# Altium PCB PCB2.PcbDoc
Units mm, origin at the board's own origin, x right, y up, seen from the top; angles counter-clockwise.
Board outline 79.5 x 87 mm, 4 copper layers (Top Layer, Int1 (GND), Int2 (GND), Bottom Layer), stack 1.369 mm thick; 72 components, 101 nets, 318 pads, 105 vias.
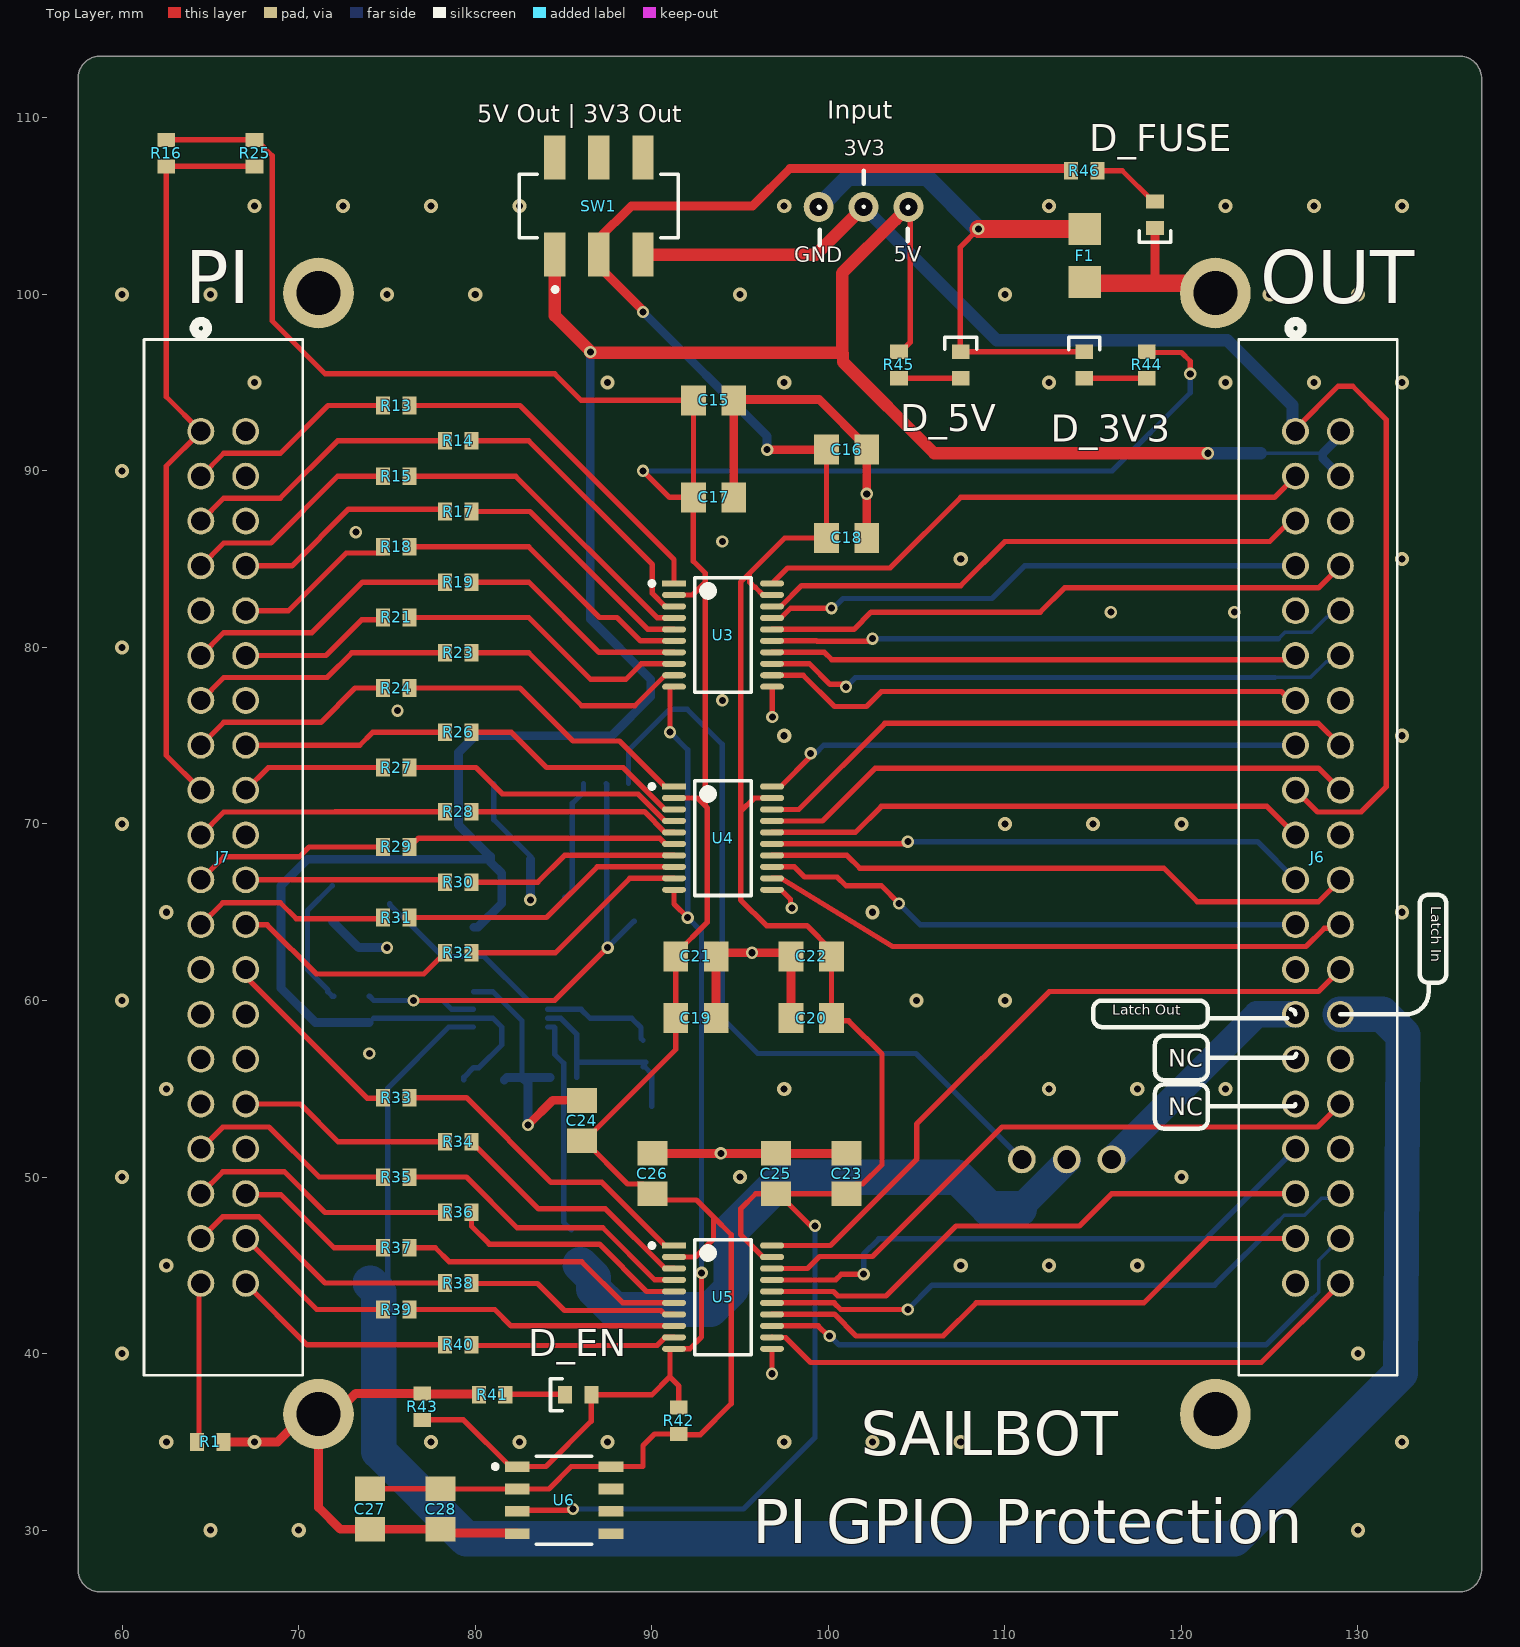
[diagram p0: Top Layer view]
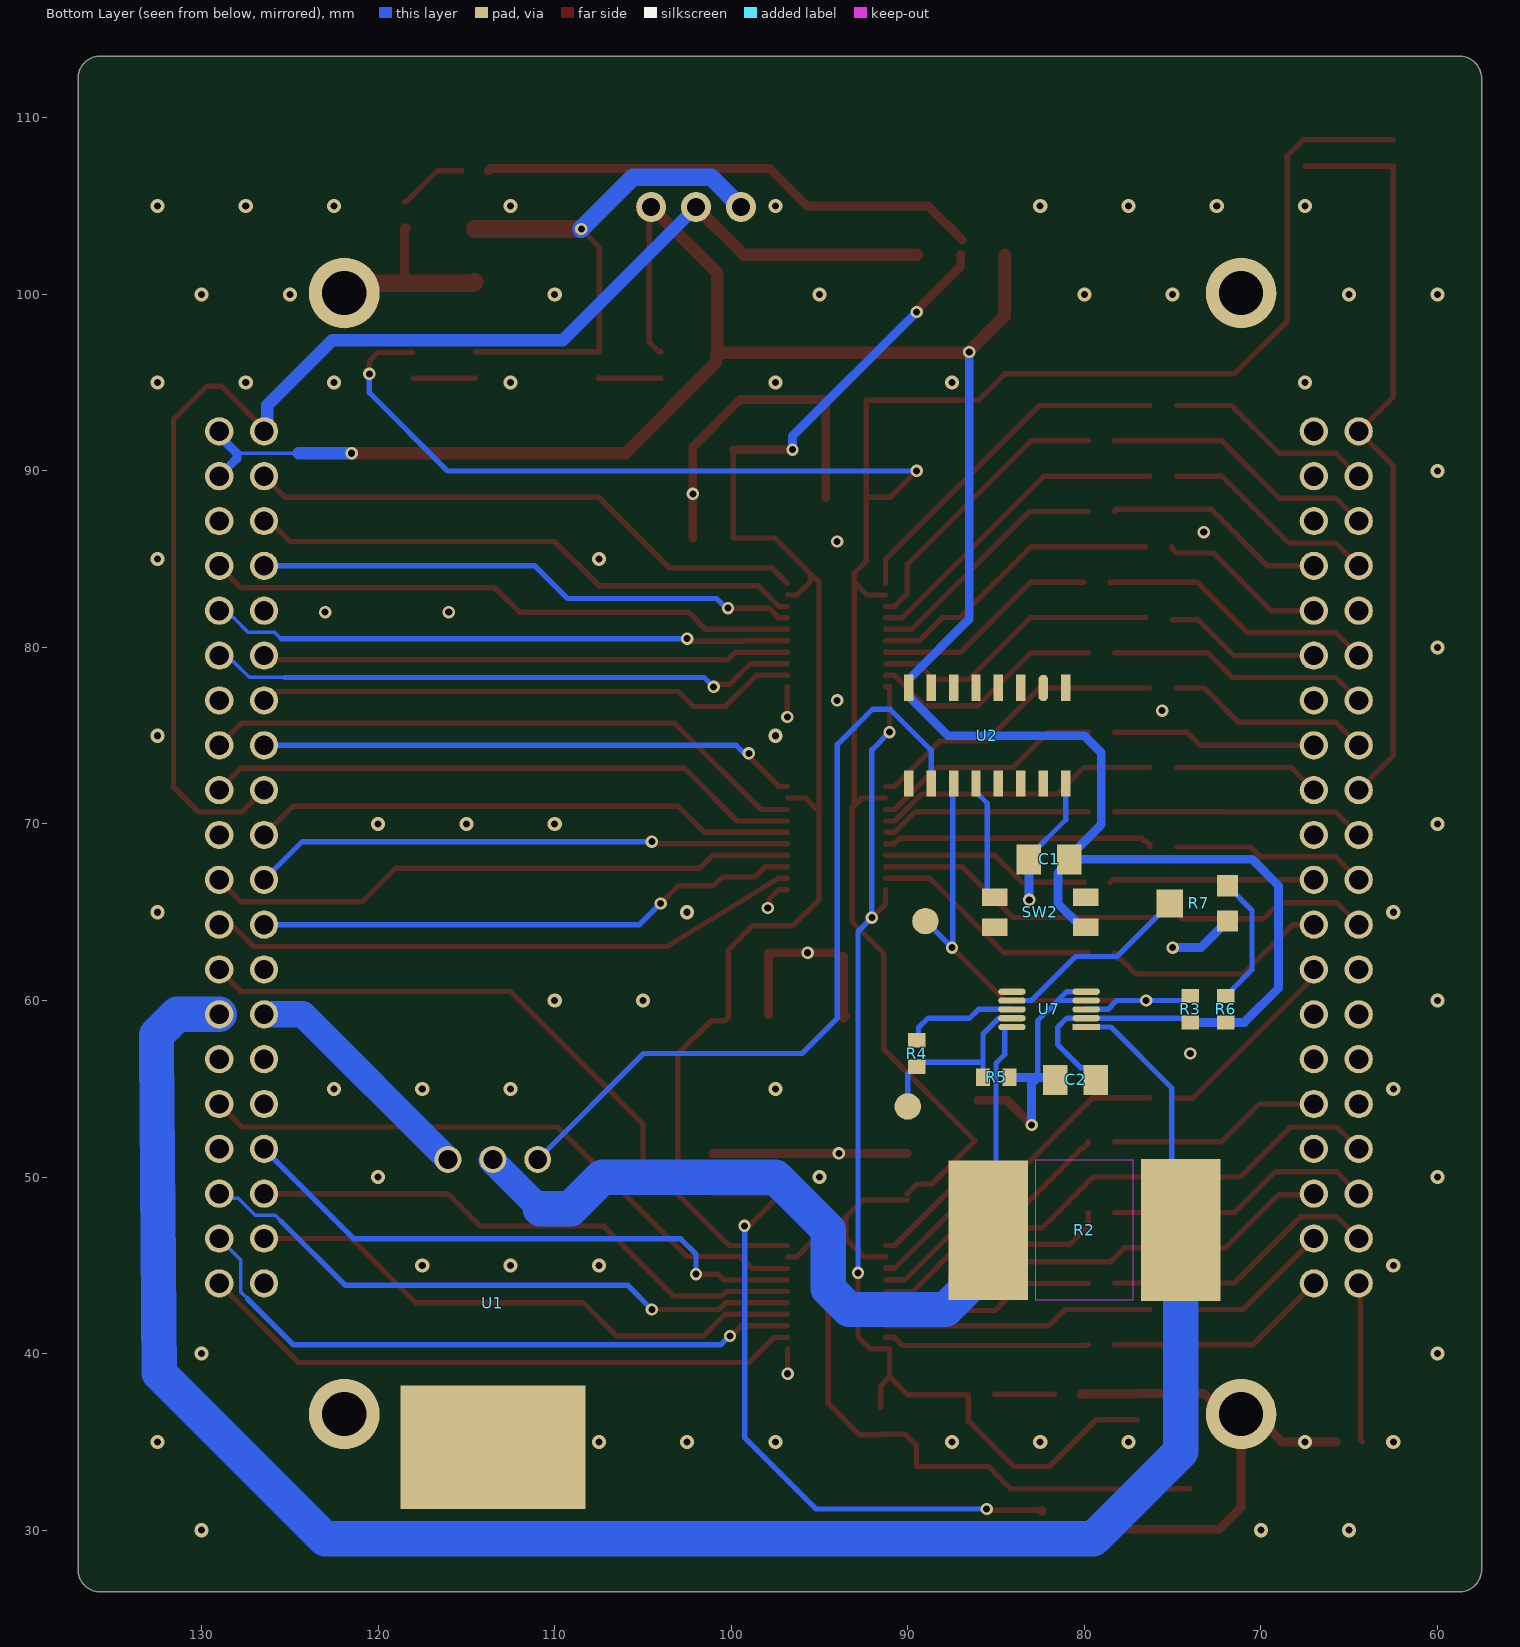
[diagram p1: Bottom Layer view, seen from below]
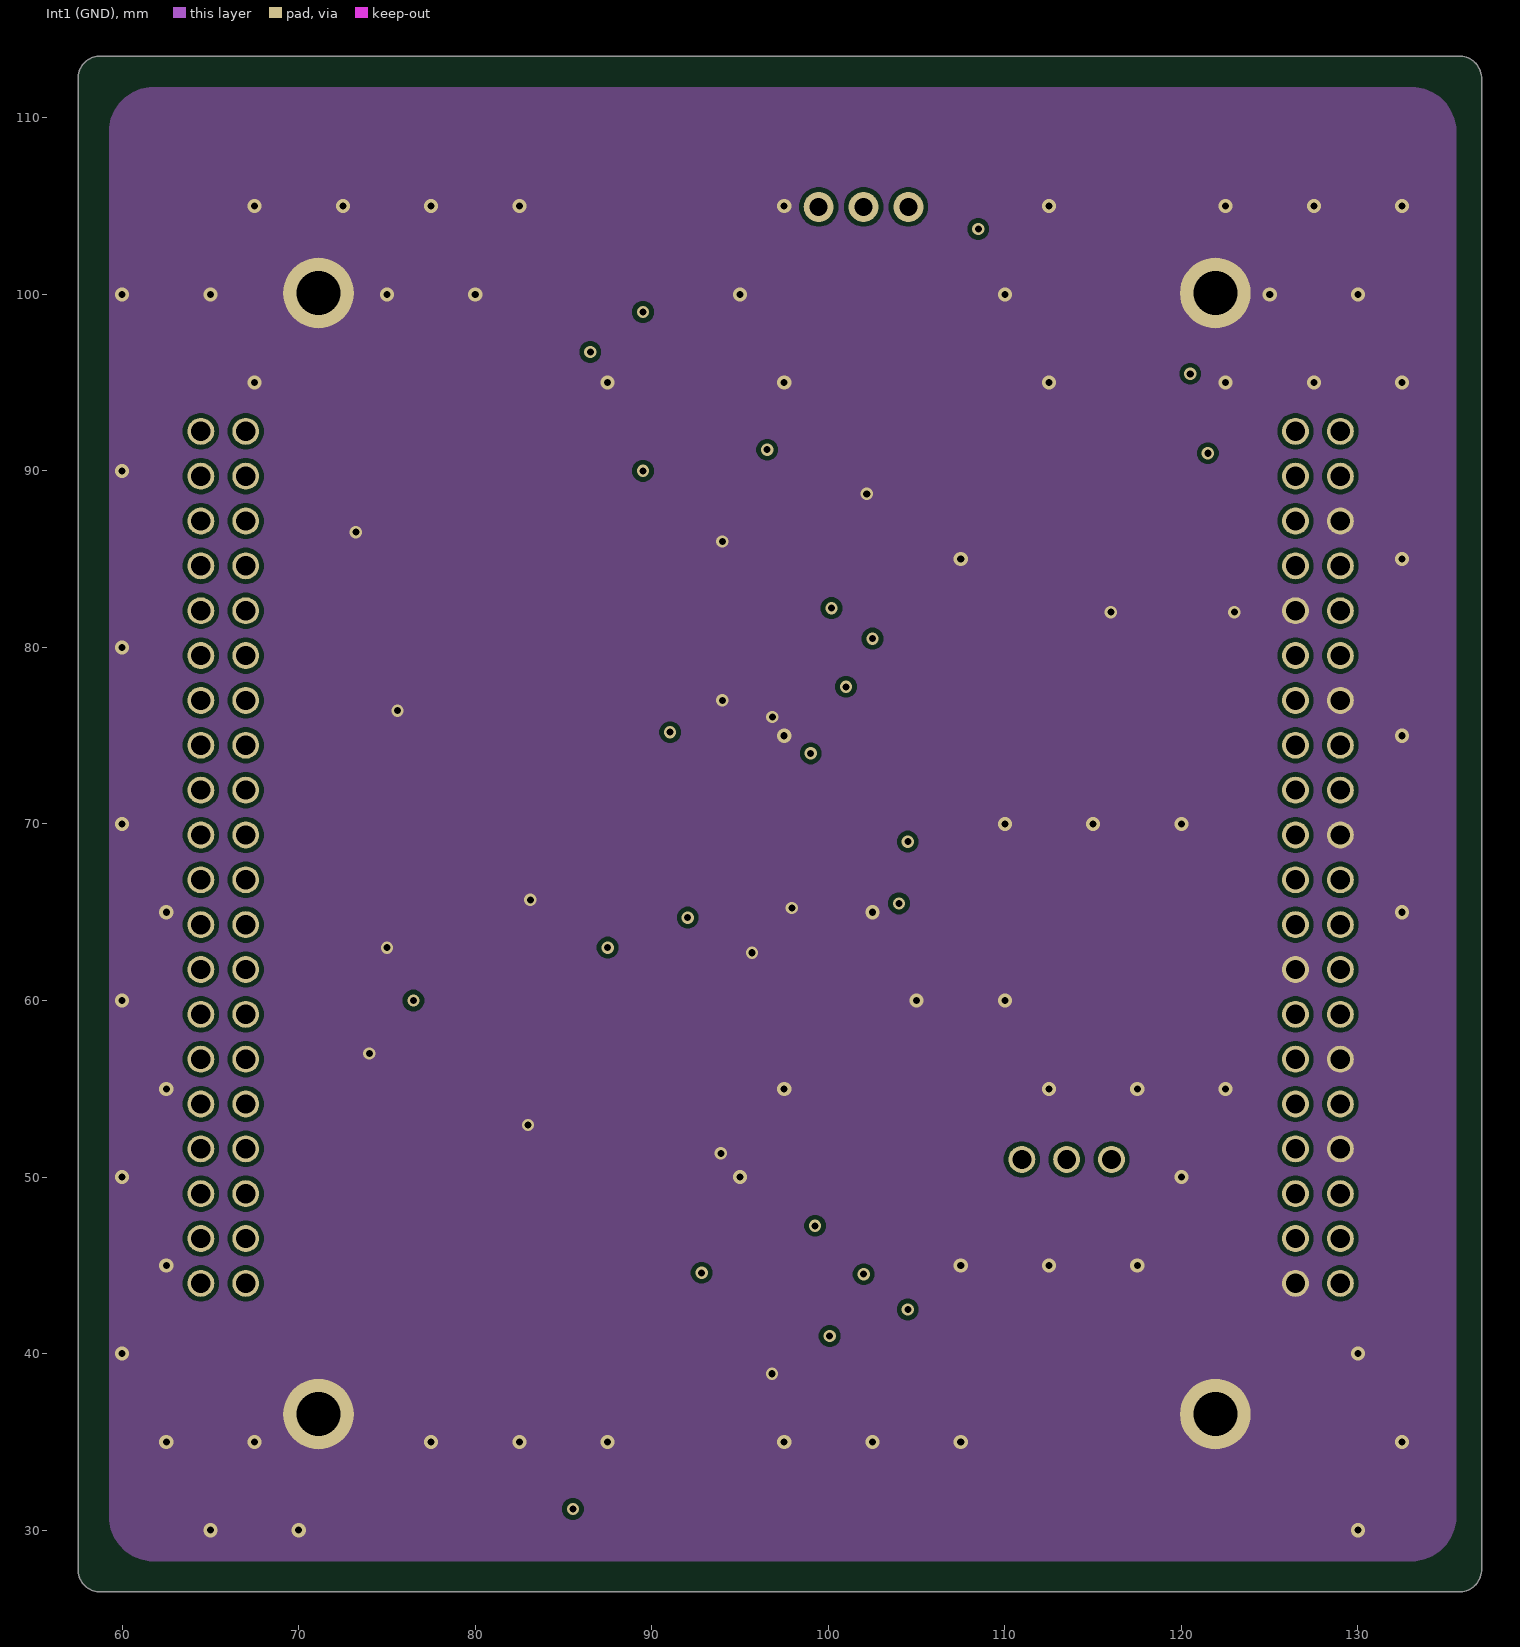
[diagram p2: Int1 (GND)]
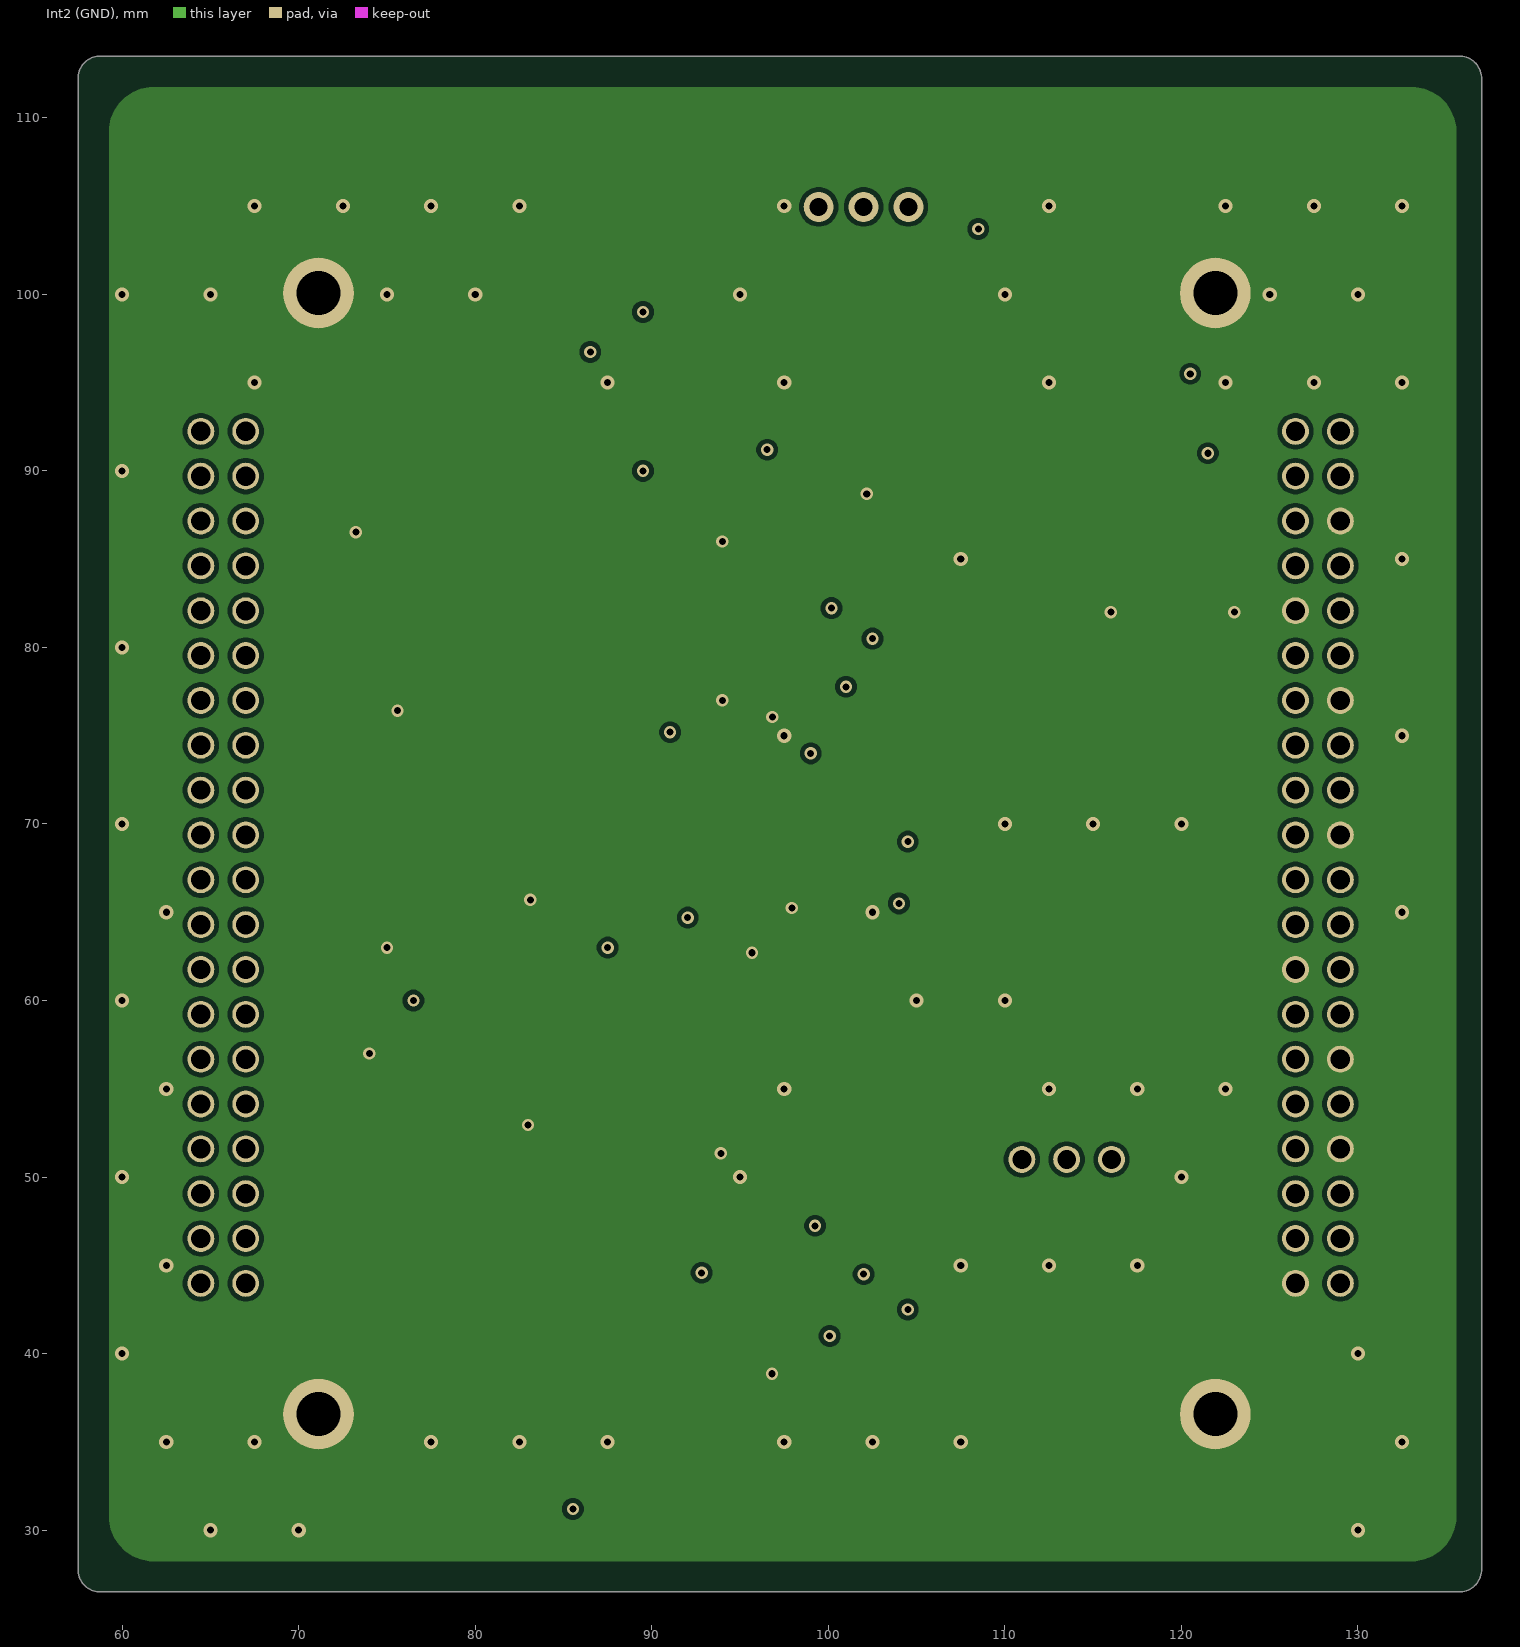
[diagram p3: Int2 (GND)]
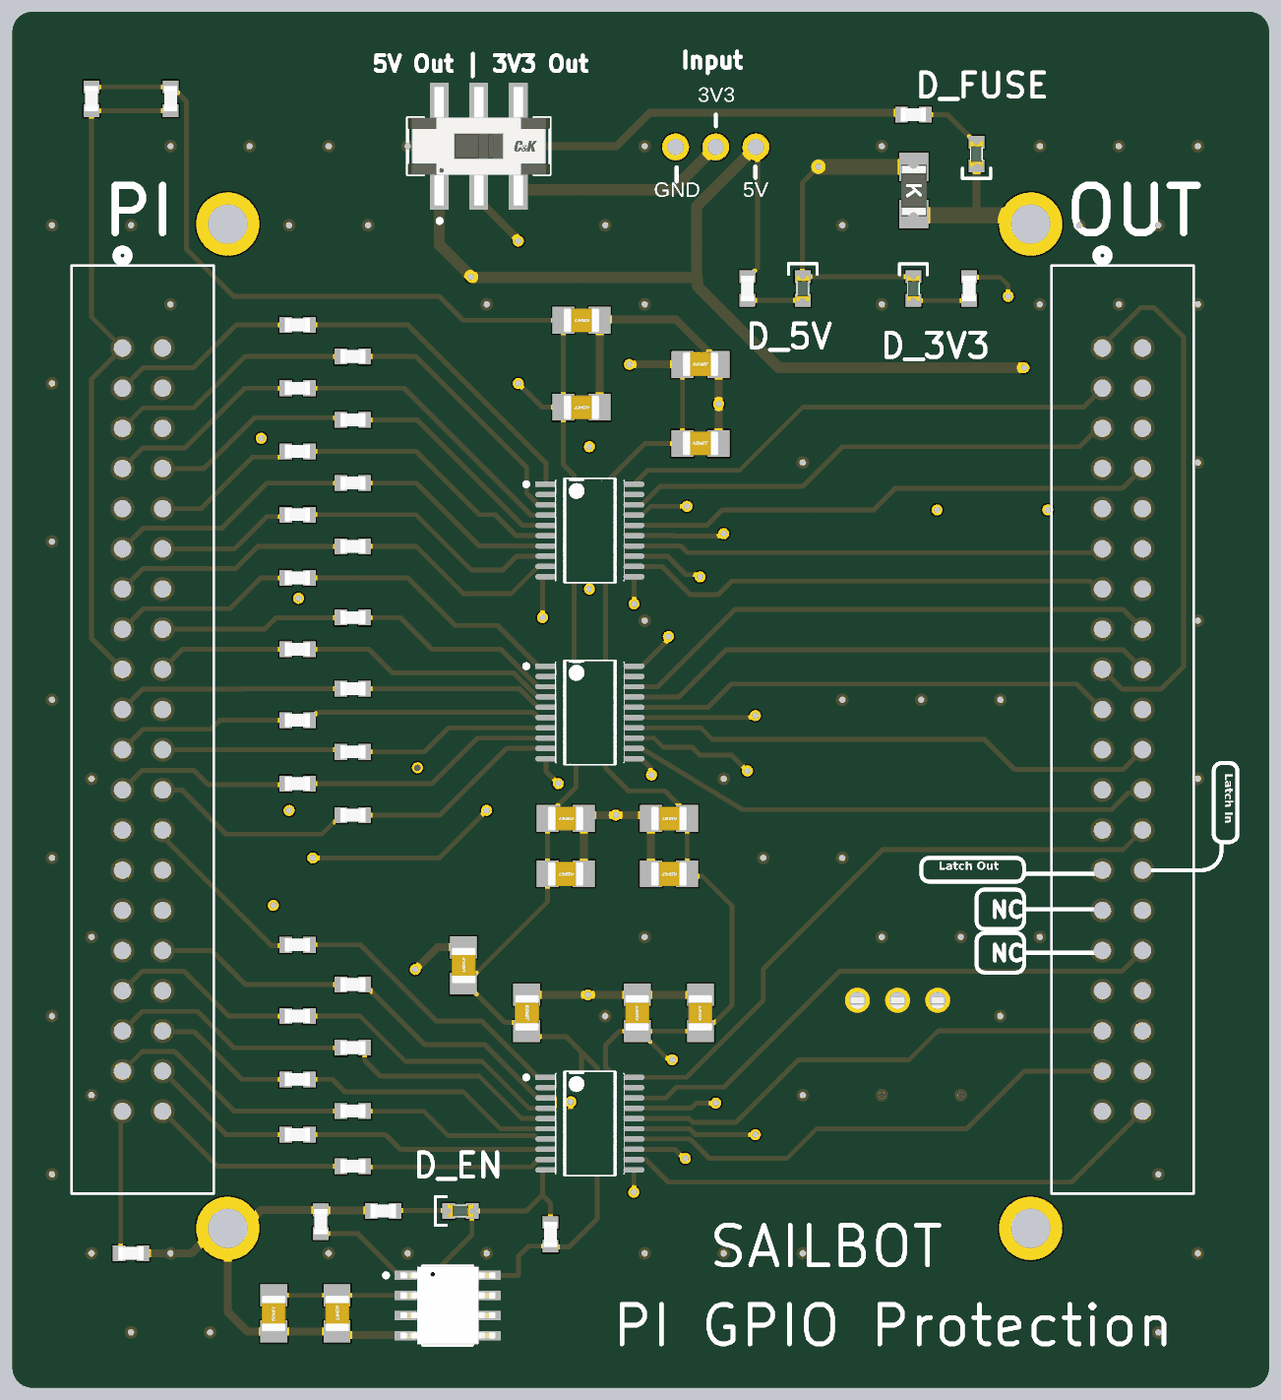
[diagram p4: 3D render of the assembled board from above, using the file's embedded part models]
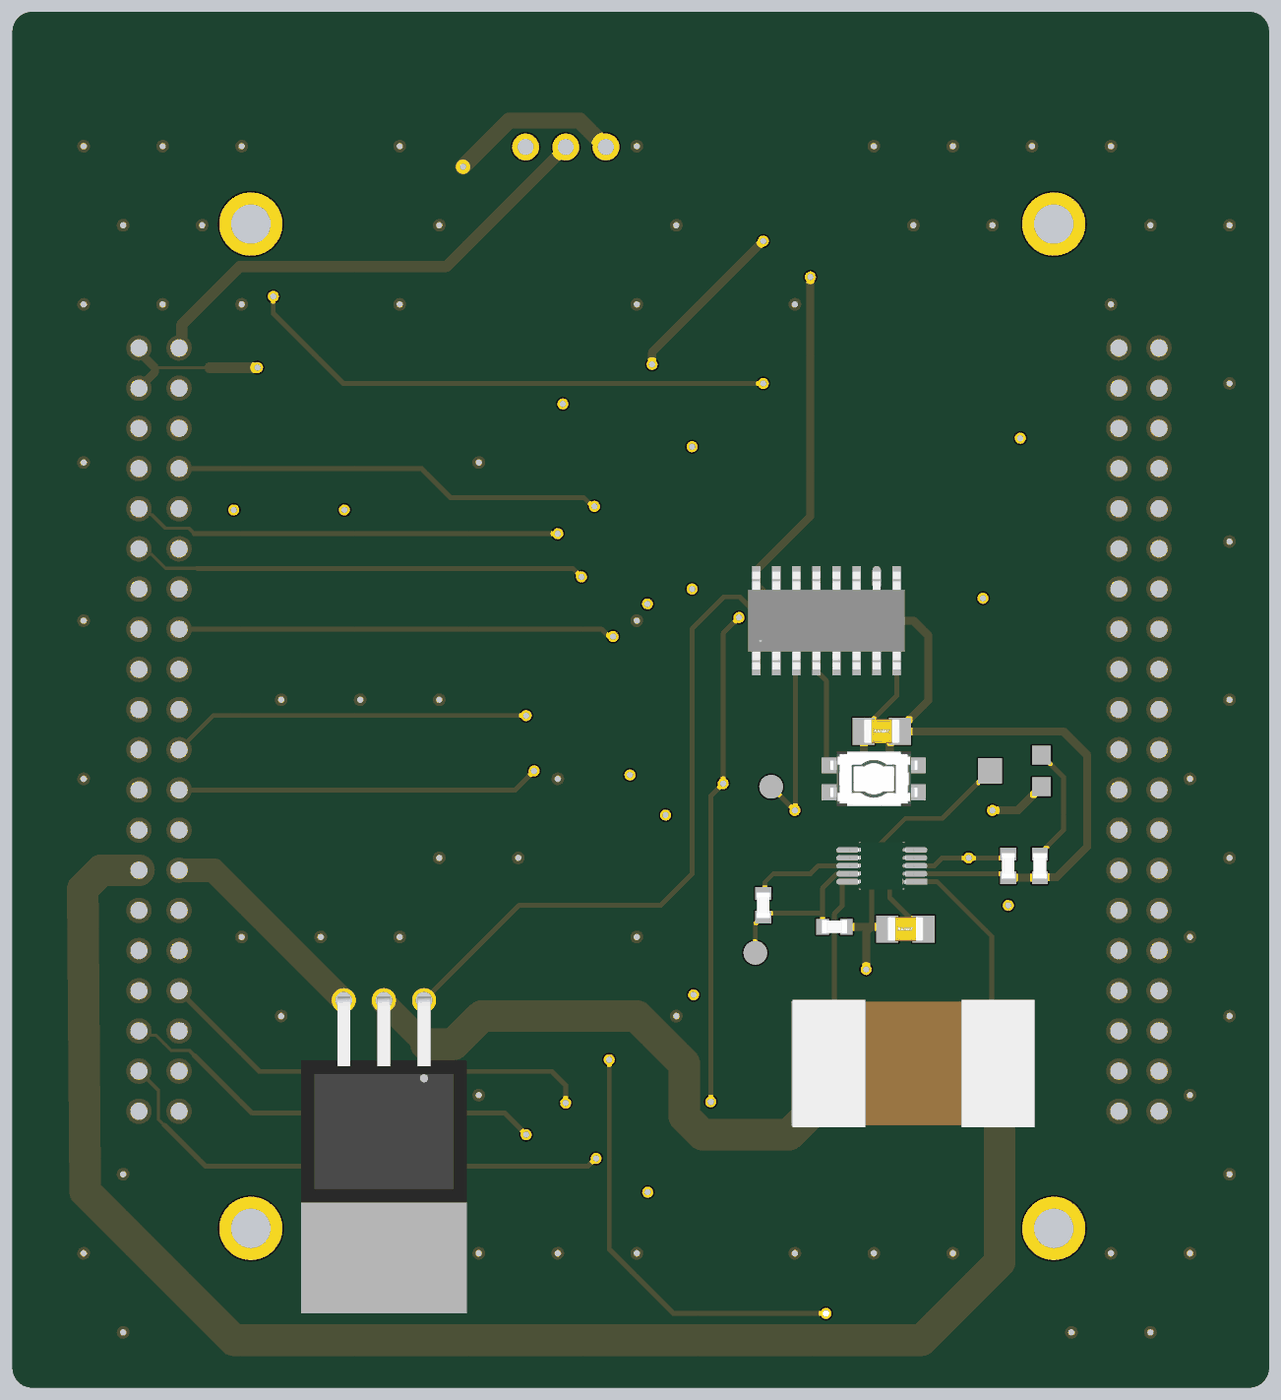
[diagram p5: 3D render of the assembled board from below, using the file's embedded part models]

## Layer stack, top to bottom
Top Solder: solder mask 0.0254, SM-001, Dk 4
Top Layer: signal copper 0.035
Dielectric 1: prepreg 0.1295, PP-017, Dk 4.3
Dielectric 2: prepreg 0.1295, PP-017, Dk 4.3
Int1 (GND): signal copper 0.035
Dielectric 3: core 0.7112, Core-039, Dk 4.8
Int2 (GND): signal copper 0.035
Dielectric 4: prepreg 0.1295, PP-017, Dk 4.3
Dielectric 5: prepreg 0.1295, PP-017, Dk 4.3
Bottom Layer: signal copper 0.035
Bottom Solder: solder mask 0.0254, SM-001, Dk 4

## Board outline
57.5,27.77 57.5,112.23 cw(c58.77,112.23) 58.77,113.5 135.73,113.5 cw(c135.73,112.23) 137,112.23 137,27.77 cw(c135.73,27.77) 135.73,26.5 58.77,26.5 cw(c58.77,27.77)

## Design rules (kind name [scope] priority, off if disabled: settings)
Clearance [All] p1: gap=0.254 ignorepadtopadclearanceinfootprint=FALSE except(0: Arc-Hole Track-Hole SMDPad-Hole THPad-Hole Via-Hole Fill-Hole Poly-Hole Region-Hole Text-Hole; 0.127: Arc-Arc Arc-Track Arc-SMDPad Track-Track Track-SMDPad SMDPad-SMDPad; 0.33: Arc-THPad Arc-Via Track-THPad Track-Via SMDPad-THPad SMDPad-Via THPad-Via Via-Via; 0.5: THPad-THPad)
DiffPairsRouting [All] p1: maxlimit=0.2 minlimit=0.2 mostfreqgap=0.2 toplayer_minwidth=0.235 toplayer_maxwidth=0.235 toplayer_prefwidth=0.235 midlayer1_minwidth=0.381 midlayer1_maxwidth=0.381 midlayer1_prefwidth=0.381 midlayer2_minwidth=0.381 midlayer2_maxwidth=0.381 midlayer2_prefwidth=0.381 bottomlayer_minwidth=0.235 bottomlayer_maxwidth=0.235 bottomlayer_prefwidth=0.235 impedanceprofiledriven=TRUE maxuncoupledlength=12.7
HoleSize [IsVia] p1: absolutevalues=TRUE maxlimit=2.54 minlimit=0 maxpercent=80.000 minpercent=20.000
PolygonConnect [All] p1: connectstyle=Direct reliefconductorwidth=0.254 reliefentries=4 polygonreliefangle="90 Angle" airgapwidth=0.254
RoutingVias [All] p1: holewidth=0.4 width=0.7 viastyle="Through Hole" minholewidth=0.3 minwidth=0.55 maxholewidth=0.4 maxwidth=0.9
SolderMaskExpansion [All] p1: expansion=0.102 istentingtop=FALSE
UnRoutedNet [All] p1: checkbadconnections=TRUE
Width [All] p1: maxlimit=5 minlimit=0.13 preferedwidth=0.3 midlayer1_minwidth=0.254 midlayer1_maxwidth=0.254 midlayer1_prefwidth=0.254 midlayer2_minwidth=0.254 midlayer2_maxwidth=0.254 midlayer2_prefwidth=0.254 minimp=50.000000 maximp=50.000000 favimp=50.000000
27 further rules are at their usual default settings.

## Classes and differential pairs
component class CurrentSensorLatch: * C1 C2 R2 R3 R4 R5 R6 R7 SW2 U1 U2 U7
component class Shifter: C15 C16 C17 C18 C19 C20 C21 C22 C23 C24 C25 C26 C27 C28 D_3V3 D_5V D_EN D_FUSE F1 Input J6 J7 R1 R13 R14 R15 R16 R17 R18 R19 R21 R23 R24 R25 R26 R27 R28 R29 R30 R31 R32 R33 R34 R35 R36 R37 R38 R39 R40 R41 R42 R43 R44 R45 R46 SW1 U3 U4 U5 U6

## Components (designator, comment, footprint, x,y, rotation, side; value= is the part's Value field where it differs from the comment)
C1 "100nF" CAP_0805 82,68 r180 bottom
C2 "100nF" CAP_0805 80.5,55.5 r180 bottom
C15 "2.2uF" CAP_0805 93.5,94 r180 top
C16 "2.2uF" CAP_0805 101.034,91.2 r0 top
C17 "100nF" CAP_0805 93.5,88.5 r180 top
C18 "100nF" CAP_0805 101.034,86.2 r0 top
C19 "2.2uF" CAP_0805 92.5,59 r180 top
C20 "2.2uF" CAP_0805 99.034,59 r180 top
C21 "100nF" CAP_0805 92.5,62.5 r180 top
C22 "100nF" CAP_0805 99.034,62.5 r180 top
C23 "2.2uF" CAP_0805 101.034,50.2 r90 top
C24 "2.2uF" CAP_0805 86.034,53.2 r270 top
C25 "100nF" CAP_0805 97.034,50.2 r90 top
C26 "100nF" CAP_0805 90.034,50.2 r270 top
C27 "2.2uF" CAP_0805 74.034,31.2 r90 top
C28 "100nF" CAP_0805 78.034,31.2 r270 top
D_3V3 "GREEN" LED_0603_GREEN 114.5,96 r270 top
D_5V "GREEN" LED_0603_GREEN 107.5,96 r270 top
D_EN "GREEN" LED_0603_GREEN 85.841,37.675 r0 top
D_FUSE "GREEN" LED_0603_GREEN 118.5,104.5 r90 top
F1 "270mA" FUSE_1206 114.534,102.2 r270 top
Input "Pin Header 1x3" "Pin Header 1x3" 104.534,104.95 r180 top
J6 "BUFFER_HIGH" CONN_3020-40-0100-00_CNC 126.46,92.24 r270 top
J7 "BUFFER_LOW" CONN_3020-40-0100-00_CNC 64.46,92.24 r270 top
R1 "10K" RES_0603 65,35 r0 top
R2 "PSR500HTQFJ2L00" RES_PSR500_ROM 80,47 r180 bottom
R3 "10K" RES_0603 74,59.5 r270 bottom
R4 "RHyst" RES_0603 89.5,57 r270 bottom
R5 "10M" RES_0603 84.993,55.649 r0 bottom
R6 "~40K" RES_0603 72,59.5 r270 bottom
R7 "35WR10KLFTR" BI-35WR10KLFTR-3_V 73.5,65.5 r0 bottom
R13 "1k" RES_0603 75.534,93.7 r0 top
R14 "1k" RES_0603 79.034,91.7 r0 top
R15 "1k" RES_0603 75.534,89.7 r0 top
R16 "1K" RES_0603 62.5,108 r90 top
R17 "1k" RES_0603 79.034,87.7 r0 top
R18 "1k" RES_0603 75.534,85.7 r0 top
R19 "1k" RES_0603 79.034,83.7 r0 top
R21 "1k" RES_0603 75.534,81.7 r0 top
R23 "1k" RES_0603 79.034,79.7 r0 top
R24 "1k" RES_0603 75.534,77.7 r0 top
R25 "1K" RES_0603 67.5,108 r90 top
R26 "1k" RES_0603 79.034,75.2 r0 top
R27 "1k" RES_0603 75.534,73.2 r0 top
R28 "1k" RES_0603 79.034,70.7 r0 top
R29 "1k" RES_0603 75.534,68.7 r0 top
R30 "1k" RES_0603 79.034,66.7 r0 top
R31 "1k" RES_0603 75.534,64.7 r0 top
R32 "1k" RES_0603 79.034,62.7 r0 top
R33 "1k" RES_0603 75.534,54.5 r0 top
R34 "1k" RES_0603 79.034,52 r0 top
R35 "1k" RES_0603 75.534,50 r0 top
R36 "1k" RES_0603 79.034,48 r0 top
R37 "1k" RES_0603 75.534,46 r0 top
R38 "1k" RES_0603 79.034,44 r0 top
R39 "1k" RES_0603 75.534,42.5 r0 top
R40 "1k" RES_0603 79.034,40.5 r0 top
R41 "1k" RES_0603 80.953,37.675 r0 top
R42 "Infinity" RES_0603 91.534,36.2 r90 top
R43 "Infinity" RES_0603 77,37 r90 top
R44 "1k" RES_0603 118.034,96 r270 top
R45 "1k" RES_0603 104,96 r270 top
R46 "1k" RES_0603 114.5,107 r0 top
SW1 "JS202011SCQN" FP-JS202011SCQN-MFG 87,105 r0 top
SW2 "EVQ-P2402M" FP-EVQ-P2402M-MFG 82.5,65 r270 bottom
U1 "N0604N-S19-AY" TO-220_REN 110.96,51 r0 bottom
U2 "MC14043BDR2G" SOIC-16_ONS 85.5,75 r90 bottom
U3 "TXS0108EPWR" FP-PW0020A-IPC_C 94.034,80.7 r0 top
U4 "TXS0108EPWR" FP-PW0020A-IPC_C 94.034,69.2 r0 top
U5 "TXS0108EPWR" FP-PW0020A-IPC_C 94.034,43.2 r0 top
U6 "LM2903DT" FP-SO8-SO-A-MFG 85.034,31.7 r0 top
U7 "INA381A4QDGSRQ1" FP-DGS0010A-IPC_B 82,59.5 r0 bottom

## Footprints (in the part's own frame and the unit in brackets; to place one, negate y for a bottom-side part, rotate by r counter-clockwise, add the part's x,y. Pads: shape width x height; smd on the part's side, far side on the other; paste and mask are expansions set on the pad)
BI-35WR10KLFTR-3_V [mm] "SMD, 3-Leads, Body 3x3.1mm"
  rect 1.2x1.2 smd: 1(-1.6,1) 3(-1.6,-1)
  rect 1.5x1.6 smd: 2(1.65,0)
  body extent -1.55,-1.5 1.55,1.5, height 1.8
CAP_0805 [mm]
  rect 1.4x1.7 smd: 1(-1.143,0) 2(1.143,0)
  body extent -1.15,-0.76 1.15,0.79, height 1.01
CONN_3020-40-0100-00_CNC [mil]
  round 60 / inner round 60 / far side round 63 hole 43 paste-31.5 mask-31.5: 1(0,0) 2(0,100) 3(100,0) 4(100,100) 5(200,0) 6(200,100) 7(300,0) 8(300,100) 9(400,0) 10(400,100) 11(500,0) 12(500,100) 13(600,0) 14(600,100) 15(700,0) 16(700,100) 17(800,0) 18(800,100) 19(900,0) 20(900,100) 21(1000,0) 22(1000,100) 23(1100,0) 24(1100,100) 25(1200,0) 26(1200,100) 27(1300,0) 28(1300,100) 29(1400,0) 30(1400,100) 31(1500,0) 32(1500,100) 33(1600,0) 34(1600,100) 35(1700,0) 36(1700,100) 37(1800,0) 38(1800,100) 39(1900,0) 40(1900,100)
  silkscreen extent -245,-127 2105,227
FP-DGS0010A-IPC_B [mm]
  rect 1.557x0.35 smd paste+0 mask+0: 1(-2.101,1)
  rrect100% 1.557x0.35 smd paste+0 mask+0: 2(-2.101,0.5) 3(-2.101,0) 4(-2.101,-0.5) 5(-2.101,-1) 6(2.101,-1) 7(2.101,-0.5) 8(2.101,0) 9(2.101,0.5) 10(2.101,1)
  body extent -2.45,-1.5 2.45,1.5, height 1.1
FP-EVQ-P2402M-MFG [mm]
  rect 1x1.45 smd paste+0 mask+0: 1(-0.85,2.575) 2(0.85,2.575) 3(-0.85,-2.575) 4(0.85,-2.575)
  body extent -1.75,-2.75 1.75,2.75, height 2.3
FP-JS202011SCQN-MFG [mm]
  rect 1.2x2.5 smd paste+0 mask+0: 1(-2.5,-2.75) 2(0,-2.75) 3(2.5,-2.75) 4(-2.5,2.75) 5(0,2.75) 6(2.5,2.75)
  silkscreen extent -4.5,-4.85 4.5,1.8, body extent -4.6,-4.1 4.6,4.1, height 0.25
FP-PW0020A-IPC_C [mm]
  rect 1.355x0.341 smd paste+0 mask+0: 1(-2.775,2.925)
  rrect100% 1.355x0.341 smd paste+0 mask+0: 2(-2.775,2.275) 3(-2.775,1.625) 4(-2.775,0.975) 5(-2.775,0.325) 6(-2.775,-0.325) 7(-2.775,-0.975) 8(-2.775,-1.625) 9(-2.775,-2.275) 10(-2.775,-2.925) 11(2.775,-2.925) 12(2.775,-2.275) 13(2.775,-1.625) 14(2.775,-0.975) 15(2.775,-0.325) 16(2.775,0.325) 17(2.775,0.975) 18(2.775,1.625) 19(2.775,2.275) 20(2.775,2.925)
  silkscreen extent -4.15,-3.25 1.6,3.25, body extent -3.55,-3.35 3.55,3.35, height 0.25
FP-SO8-SO-A-MFG [mm]
  rect 1.4x0.6 smd paste+0 mask+0: 1(-2.65,1.905) 2(-2.65,0.635) 3(-2.65,-0.635) 4(-2.65,-1.905) 5(2.65,-1.905) 6(2.65,-0.635) 7(2.65,0.635) 8(2.65,1.905)
  silkscreen extent -4.02,-2.5 1.57,2.5, body extent -3.45,-2.6 3.45,2.6, height 0.25
FUSE_1206 [mm]
  rect 1.8x1.84 smd: 1(-1.5,0) 2(1.5,0)
  body extent -1.65,-0.82 1.65,0.81, height 0.84
LED_0603_GREEN [mm]
  rect 0.8x1 smd: A(0.75,0) K(-0.75,0)
  silkscreen extent -1.57,-0.88 -0.88,0.88, body extent -0.8,-0.4 0.8,0.4, height 0.6
"Pin Header 1x3" [mm] "0.1\" pin header"
  round 1.7 hole 1.02: 1(0,0) 2(2.54,0) 3(5.08,0)
RES_0603 [mm]
  rect 0.8x1 smd: 1(-0.75,0) 2(0.75,0)
  body extent -0.8,-0.43 0.8,0.43, height 0.52
RES_PSR500_ROM [mil]
  rect 177.2x311.02 smd paste+0 mask+0: 1(-214.5,0)
  rect 177.17x317 smd paste+0 mask+0: 2(214.5,0)
  Top Layer keep-out region: -108,-156.5 -108,156.5 108,156.5 108,-156.5
  body extent -301,-159 301,159, height 79
SOIC-16_ONS [mil]
  rect 59x21 smd paste+0 mask+0: 1(-106.5,175) 2(-106.5,125) 3(-106.5,75) 4(-106.5,25) 5(-106.5,-25) 6(-106.5,-75) 7(-106.5,-125) 8(-106.5,-175) 9(106.5,-175) 11(106.5,-75) 12(106.5,-25) 13(106.5,25) 14(106.5,75) 15(106.5,125) 16(106.5,175)
  oval 59x21 smd paste+0 mask+0: 10(106.5,-125)
  body extent -122,-195 122,195, height 69
TO-220_REN [mil]
  round 60 / inner round 60 / far side round 62 hole 42 paste-31 mask+0: 1(0,0) 2(100,0) 3(200,0)
  rect 413x276 smd paste+0 mask+0: 4(100,642)
  body extent -106,-8 306,506, height 179

## Part data
C1 C2 C15 C16 C17 C18 C19 C20 C21 C22 C23 C24 C25 C26 C27 C28: library part CAP_0805_16V, "Capacitor SMD 0805 16V"
D_3V3 D_5V D_EN D_FUSE: library part LED_0603_GREEN, "LED 0603 GREEN SMD"
F1: library part FUSE_PPTC_1206, "Fuse PPTC SMD 1206 / SMD1206B010TF"
Input: ".1\" pitch pin header"
J6 J7: library part 3020-40-0100-00, "No Description Available", Mfr_Name="CNC Tech", RefDes=RefDes, Type=Type
R1 R3 R4 R5 R6 R13 R14 R15 R16 R17 R18 R19 R21 R23 R24 R25 R26 R27 R28 R29 R30 R31 R32 R33 R34 R35 R36 R37 R38 R39 R40 R41 R42 R43 R44 R45 R46: library part RES_0603, "Resistor SMD 0603"
R2: "No Description Available", Mfr_Name="ROHM Semiconductor"
R7: library part CMP-009-00041-2, "3 mm Single-Turn Open Frame Surface Mount Cermet Trimming Potentiometer, +/- 25%, 35 W, -40 to 125 degC, 3-Pin SMD, RoHS, Tape and Reel", Manufacturer="BI Technologies", Max Operating Temperature=125°C, Min Operating Temperature=-40°C, Package Description="3-Pin Surface Mount Device, Body 3 x 3.1 mm", Package Quantity=2000, Power=100mW, Resistance=10k, Tolerance=25%, Voltage Rating=50V, Case/Package=35WR10KLFTR, Composition=Potentiometer, Datasheet URL=http://www.bitechnologies.com/pdfs/35.pdf, Datasheet Version=Feb-10, Manufacturer URL=http://www.bi-technologies.net/, Mounting Technology=SM, Package Reference=35WR10KLFTR, Packaging=TapeandReel, RoHS Compliant=True
SW1: library part CMP-2000-05087-3, "SWITCH SLIDE DPDT 300MA 6V", Actuator Color=Black, Contact Current Rating=300mA, Contact Resistance=70mR, Flammability Rating="UL94 V-2", Max Operating Temperature=85°C, Max Voltage Rating (DC)=6V, Min Operating Temperature=-20°C, Package Quantity=1, Actuator Length=2mm, Actuator Material=Nylon, Actuator Type=Standard, Contact Material="Copper Alloy", Contact Plating=Silver, Current Rating=300mA, Depth=7.5mm, Electrical Life=5000Cycles, Housing Material=Nylon, Lead Free="Lead Free", Length=9mm, Max Current Rating=300mA, Mount="Surface Mount", Orientation=Vertical, Packaging="Tape and Reel", Radiation Hardening=No, REACH SVHC="No SVHC", Series=JS, Switch Function=On-On, Switch Travel=2mm, Termination="Gull Wing", Throw Configuration=DPDT, Voltage Rating (DC)=6V
SW2: library part CMP-05618-000087-1, "SWITCH TACTILE SPST-NO 0.02A 15V", Actuator Color=Natural, Color=Clear, Contact Current Rating=20mA, Contact Resistance=100mR, Max Operating Temperature=85°C, Max Voltage Rating (DC)=15V, Min Operating Temperature=-40°C, Operating Force=2.4N, Package Quantity=1, Actuator Length=0.45mm, Current Rating=20mA, Depth=5.5mm, Electrical Life=500000Cycles, Height=2.1mm, Illumination Type=Non-Illuminated, Lead Free="Lead Free", Length=3.5mm, Max Current Rating=20mA, Mechanical Life=500000Cycles, Mount="Surface Mount", Orientation=Straight, Packaging="Tape and Reel", Radiation Hardening=No, REACH SVHC="No SVHC", RoHS Compliant=Yes, Series=EVQP2, Size=3.5mm, Switch Function=Off-Mom, Switch Travel=0.25mm, Termination=J-Bend, Throw Configuration=SPST, Voltage Rating (DC)=15V, Width=3.5mm
U1: "No Description Available", Mfr_Name="Renesas Electronics", RefDes=RefDes, Type=Type
U2: "No Description Available", Mfr_Name=onsemi, RefDes=RefDes, Type=Type
U3 U4 U5: library part CMP-2000-04956-2, "IC TRNSLTR BIDIRECTIONAL 20TSSOP", Case/Package=TSSOP, High Level Output Current=-50mA, Low Level Output Current=50mA, Max Operating Temperature=85°C, Max Supply Voltage=5.5V, Min Operating Temperature=-40°C, Min Supply Voltage=1.2V, Nominal Supply Current=8uA, Output Current=620uA, Package Quantity=1, Quiescent Current=3uA, Contact Plating=Gold, Data Rate=60Mbps, Height=1.15mm, Lead Free="Lead Free", Length=6.5mm, Logic Function=Translator, Mount="Surface Mount", Number of Bits=8, Number of Channels=8, Number of Inputs=8, Number of Pins=20, Output Type=Voltage, Packaging="Tape and Reel", Propagation Delay=4.8ns, Radiation Hardening=No, REACH SVHC="No SVHC", Rise Time=6.3ns, RoHS Compliant=Yes, Series=-, Supply Current=8uA, Termination=SMD/SMT, Turn-On Delay Time=312ns, Weight=0.002716oz, Width=4.4mm
U6: library part CMP-12132-000004-1, "IC COMPARATOR LP DUAL 8-SOIC", Ambient Temperature Range High=+125°C, Ambient Temperature Range Low=-40°C, Input Bias Current=0.025uA, Input Offset Voltage=1mV, Manufacturer=STMicroelectronics, Max Dual Supply Voltage=18V, Max Junction Temp=+150°C, Max Supply Voltage=36V, Min Dual Supply Voltage=1V, Min Supply Voltage=2V, Nominal Supply Current=0.4-1mA, Output Current Per Channel=16mA, Package=SO8-SO-A, Temperature="to +150°C", Voltage Gain=200V/mV, Automotive=No, Category=IC, ComponentLink2Description=Datasheet, ComponentLink2URL=https://www.st.com/content/ccc/resource/technical/document/datasheet/44/f7/9d/99/42/20/45/fd/CD00000534.pdf/files/CD00000534.pdf/jcr:content/translations/en.CD00000534.pdf, Device Class L1="Integrated Circuits (ICs)", Device Class L2="Linear ICs", Device Class L3=Comparators, Digikey Description="IC COMPARATOR LP DUAL 8-SOIC", Footprint Url=https://www.st.com/content/ccc/resource/technical/document/datasheet/group3/16/9a/68/4c/7d/03/4a/09/DM00396770/files/DM00396770.pdf/jcr:content/translations/en.DM00396770.pdf, Height=1.75mm, Ipc Land Pattern Name=SOIC127P600X175-8, Lead Free=Yes, Manufacturer Part Number=LM2903DT, Mouser Description="Analog Comparators Lo-Pwr Dual Voltage", Number of Channels=2, Octopart=https://octopart.com/lm2903dt-stmicroelectronics-428473, Response Time=1.3us, RoHS=TRUE, Standoff Height=0.1mm, Temperature Range High=+150°C
U7: library part CMP-04895-000492-1, "CURRENT SENSE AMPLIFIER / INA381A4", Case/Package=VSSOP, Max Operating Temperature=125°C, Min Operating Temperature=-40°C, Accuracy=1%, Mount="Surface Mount", Series="Automotive, AEC-Q100"

## Free pads (board coordinates)
  round 4 hole 2.5: 5(71.12,100.076) 6(121.92,100.076) 7(121.92,36.576) 8(71.12,36.576)
  round 1.5 smd far side: 9(89,64.5) 10(90,54)

## Via types
v1: diameter 0.8, hole 0.4, Top Layer to Bottom Layer, tented both sides, 66 vias
v2: diameter 0.7, hole 0.4, Top Layer to Bottom Layer, 39 vias

## Nets (pads, with @x,y where several pads share a name; then routed paths per layer and width w, separated by ;. In a path a pad name is that pad's centre, name@x,y a point inside that pad or via, vN(x,y) a via of type N, cw(c..) or ccw(c..) an arc to the next point about the centre after c; other vN are vias at no path point)
3V3: Input.2 J6.1 J6.17 SW1.3 | length 78.2
  Top Layer w0.3: J6.17 127.702,70.678 130.178,70.678 131.592,72.092 131.592,92.908 129.703,94.797 128.875,94.797 J6.1@126.46,92.382
  Top Layer w0.7: SW1.3 99.294,102.25 Input.2
  Top Layer w1: J6.1 J6.1@126.46,92.382
  Bottom Layer w0.7: Input.2 109.548,97.396 122.604,97.396 126.288,93.712 126.288,92.412 J6.1
3V3PI: C15.2 C17.2 C19.2 C21.2 C24.2 C26.2 C27.2 C28.1 R16.2 R25.2 R42.1 R44.1 U3.2 U4.2 U5.2 U6.2 U6.8 | length 179
  Top Layer w0.3: R16.2 R25.2 67.6,108.75 68.5,107.85 68.5,98.5 71.5,95.5 84.5,95.5 86,94 C15.2 C17.2 91,88.5 v2(89.5,90) ; C27.2 C28.1 78.038,32.339 82.38,32.339 U6.2 84.169,32.335 85.439,33.605 U6.8 89.506,33.605 89.506,34.795 90.161,35.45 R42.1 91.581,35.403 92.737,35.403 94.5,37.166 94.5,46.734 93.5,47.734 ; C26.2@90.034,48.7 92.534,48.7 93.5,47.734 ; C26.2 89.484,49.607 88.634,49.607 86.184,52.057 91.357,57.23 C19.2 C21.2 91.357,62.65 93.149,64.442 93.149,70.909 93.034,71.024 ; U4.2 92.583,71.475 93.034,71.024 ; U3.2 92.309,82.975 93.034,83.7 ; U5.2@91.856,45.483 91.266,45.483 U5.2 92.475,45.475 93.5,46.5 93.5,47.734 ; C17.2@92.348,88.491 92.348,84.886 93.034,84.2 93.034,83.7 ; R44.1@118.034,96.71 120,96.71 120.5,96.21 v2(120.5,95.5) ; 93.034,71.024 93.034,83.7
  Bottom Layer w0.3: v2(89.5,90) 116.073,90 120.5,94.427 v2(120.5,95.5)
3V3PI_Unprotected: J7.1 J7.17 R16.1 R25.1 | length 42.8
  Top Layer w0.3: J7.17 62.5,73.88 62.5,90.28 J7.1 62.5,94.2 R16.1 R25.1
5V: C1.2 C2.2 Input.1 J6.2 J6.4 R3.2 R6.2 R45.1 SW1.1 SW2.2 U2.16 U7.2 | length 152.6
  Top Layer w0.3: R45.1 104.1,96.75 104.645,97.295 104.645,104.839 Input.1
  Top Layer w0.7: SW1.1 84.5,98.798 v2@86.518,96.779 ; v2(86.518,96.733) 86.552,96.7 100.784,96.7 ; Input.1 104.344,104.761 103.811,104.227 100.784,101.2 100.784,96.7 ; v2(121.5,91) 106,91 100.834,96.166 100.834,96.65 100.784,96.7
  Bottom Layer w0.2: 124.5,91 128,91
  Bottom Layer w0.3: R3.2@74.24,58.99 U7.2@79.89,58.99 ; C2.2 79.357,55.65 79.907,56.2 80.207,56.2 81.5,57.493 81.5,58.5 81,59 U7.2
  Bottom Layer w0.5: R6.2@71.984,58.766 70.936,58.766 69,60.702 69,66.5 70.5,68 C1.2 ; R6.2 R3.2 ; SW2.2 80.15,64.15 81.5,65.5 81.5,67.207 80.857,67.85 C1.2 ; v2(86.518,96.733) 86.517,96.732 86.517,81.616 89.945,78.188 U2.16 89.945,77.222 87.722,75 80,75 79.046,74.046 79.046,69.961 80.857,68.15 C1.2 ; J6.4 128,90.7 128,91 129,92 J6.2
  Bottom Layer w0.7: v2(121.5,91) 124.5,91
Alert: pad.9 R3.1 U2.3 U7.3 | length 29.9
  Top Layer w0.3: v2(76.5,60) 84.5,60 v2(87.5,63)
  Bottom Layer w0.3: R3.1 74.25,60 v2(76.5,60) 78.168,60 78.668,59.5 U7.3 ; U2.3 87.452,72.247 87.452,63.048 v2(87.5,63) pad.9
Battery+: J6.28 R2.2 U7.1 | length 114.1
  Bottom Layer w0.3: R2.2@75.052,44 75.052,55.052 78.5,58.5 U7.1
  Bottom Layer w2: R2.2@74.052,44 74.541,43.511 74.541,34.459 79.492,29.508 123.008,29.508 132.402,38.902 132.55,57.212 132.55,58.048 131.964,58.634 131.378,59.22 J6.28
CMP_Out: D_EN.A R42.2 R43.1 U3.10 U4.10 U5.10 U6.1 | length 63.3
  Top Layer w0.3: R43.1 79.339,36.25 81.984,33.605 U6.1 84,33.605 86.571,36.176 D_EN.A@86.571,37.655 ; D_EN.A 90.008,37.675 91.034,38.7 91.034,40.256 91.052,40.275 92.15,40.275 92.82,40.945 v2(92.82,44.579) ; 91.034,38.673 91.534,38.173 R42.2 ; v2(91.034,75.2) 91.034,77.756 91.052,77.775 U3.10 ; U4.10 91.258,65.475 v2(92.034,64.7)
  Bottom Layer w0.3: v2(91.034,75.2) 92.034,74.2 v2(92.034,64.7) 92.82,63.914 v2(92.82,44.579)
CMPIN: R4.1 U7.8 | length 6.5
  Bottom Layer w0.3: U7.8@84.102,59.501 85.999,59.501 86.5,59 88.858,59 89.391,58.467 89.391,57.859 R4.1
CMPREF: R7.2 U7.7 | length 11.3
  Bottom Layer w0.3: R7.2 75.15,65.45 75.75,64.85 75.8,64.85 78.15,62.5 80.5,62.5 83,60 U7.7
ENABLE_LED: D_EN.K R41.2 | length 3.4
  Top Layer w0.3: R41.2@81.703,37.701 D_EN.K@85.091,37.701
GND: C1.1 C2.1 C15.1 C16.2 C17.1 C18.2 C19.1 C20.2 C21.1 C22.2 C23.2 C24.1 C25.2 C26.1 C27.1 C28.2 D_FUSE.K F1.2 J6.6 J6.9 J6.14 J6.20 J6.25 J6.30 J6.34 J6.39 pad.5 pad.6 pad.7 pad.8 R1.2 R5.1 R7.1 R41.1 R43.2 U2.8 U3.11 U4.11 U5.11 U6.4 U7.4 U7.5 | length 119.2
  Top Layer w0.3: v2(96.809,38.863) U5.11 ; U4.11 97.316,66.275 97.855,65.736 97.855,65.321 v2(97.932,65.244) ; U3.11 96.825,77.759 v2(96.825,76.059) ; J6.25 J6.25@126.625,61.925
  Top Layer w0.5: R1.2 68.807,35 70.383,36.576 pad.8 ; R41.1 80.165,37.713 77.038,37.713 R43.2 73.241,37.75 72.067,36.576 pad.8 ; U6.4 82.334,29.845 78.246,29.845 C28.2 C27.1 72.356,30.057 71.12,31.293 pad.8 ; v2(82.986,52.95) 84.385,54.349 86.027,54.349 C24.1 ; C26.1 C25.2 C23.2 ; C19.1@93.521,59.122 C19.1 C21.1 ; C21.1@94.034,62.7 94.042,62.709 97.819,62.709 97.859,62.669 97.891,62.7 C20.2@97.891,59.2 ; C17.1 C15.1 ; C15.1@94.643,94.047 99.48,94.047 102.177,91.35 C16.2 v2(102.177,88.7) C18.2 ; D_FUSE.K@118.4,103.75 D_FUSE.K 118.5,100.626
  Top Layer w1: F1.2 114.608,100.626 118.5,100.626 121.37,100.626 pad.6
  Bottom Layer w0.3: U7.4 81.5,60 ; U7.5 81,60.5 81.5,60 ; U2.8 81.055,70.238 83.143,68.15 C1.1 ; 82.643,55.643 82.643,58.857 81.5,60 ; v2@97.855,65.168 v2(97.932,65.244)
  Bottom Layer w0.5: R7.1 73.4,63 v2(75,63) ; C2.1 81.786,55.643 82.643,55.643 ; v2(82.986,52.95) 82.986,55.3 82.643,55.643 ; v2(83.122,65.702) 83.132,65.712 83.132,67.989 C1.1 ; R5.1 82.649,55.649 82.643,55.643
  Bottom Layer w1: pad.6 pad.6@122.166,99.83
  other v1: 65,30 70,30 130,30 62.5,35 67.5,35 77.5,35 82.5,35 87.5,35 97.5,35 102.5,35 107.5,35 132.5,35 60,40 130,40 62.5,45 107.5,45 112.5,45 117.5,45 60,50 95,50 120,50 62.5,55 97.5,55 112.5,55 117.5,55 122.5,55 60,60 105,60 110,60 62.5,65 102.5,65 132.5,65 60,70 110,70 115,70 120,70 97.5,75 132.5,75 60,80 107.5,85 132.5,85 60,90 67.5,95 87.5,95 97.5,95 112.5,95 122.5,95 127.5,95 132.5,95 60,100 65,100 75,100 80,100 95,100 110,100 125,100 130,100 67.5,105 72.5,105 77.5,105 82.5,105 97.5,105 112.5,105 122.5,105 127.5,105 132.5,105
  other v2: 93.908,51.343 74,57 95.676,62.709 75.597,76.417 94,77 116,82 123,82 94,86 73.236,86.535
GND_INPUT: D_3V3.K D_5V.K F1.1 Input.3 | length 31.4
  Top Layer w0.3: v2(108.494,103.7) 107.478,102.685 107.478,96.772 D_5V.K 107.6,96.75 D_3V3.K
  Top Layer w1: v2(108.494,103.7) F1.1
  Bottom Layer w1: Input.3 101.134,106.63 105.564,106.63 v2(108.494,103.7)
IN_3: R13.2 U3.1 | length 19.9
  Top Layer w0.3: R13.2 82.534,93.7 91.258,84.975 U3.1
IN_5: R14.2 U3.3 | length 16.3
  Top Layer w0.3: R14.2 83.034,91.7 90.034,84.7 90.034,83.06 90.73,82.363 90.73,82.356 90.762,82.325 U3.3
IN_7: R15.2 U3.4 | length 18.3
  Top Layer w0.3: R15.2 82.291,89.7 90.316,81.675 U3.4
IN_8: R17.2 U3.5 | length 14.2
  Top Layer w0.3: R17.2 83.1,87.7 89.775,81.025 U3.5
IN_10: R18.2 U3.6 | length 16.9
  Top Layer w0.3: R18.2@76.534,85.7 83.034,85.7 87.034,81.7 88.034,81.7 89.359,80.375 U3.6
IN_11: R19.2 U3.7 | length 12.9
  Top Layer w0.3: R19.2@80.034,83.7 83.034,83.7 87.009,79.725 U3.7
IN_12: R21.2 U3.8 | length 16.5
  Top Layer w0.3: R21.2@76.534,81.7 83.034,81.7 86.534,78.2 88.534,78.2 89.409,79.075 U3.8
IN_13: R23.2 U3.9 | length 13.4
  Top Layer w0.3: R23.2 83.034,79.7 86.034,76.7 89.037,76.7 90.762,78.425 U3.9
IN_15: R24.2 U4.1 | length 17.3
  Top Layer w0.3: R24.2 82.534,77.7 85.534,74.7 88.176,74.7 90.751,72.125 U4.1
IN_16: R26.2 U4.3 | length 13.3
  Top Layer w0.3: R26.2 82.034,75.2 84.034,73.2 88.376,73.2 90.751,70.825 U4.3
IN_18: R27.2 U4.4 | length 16.2
  Top Layer w0.3: R27.2 80.034,73.2 81.534,71.7 89.226,71.7 90.751,70.175 U4.4
IN_19: R28.2 U4.5 | length 12
  Top Layer w0.3: R28.2 89.576,70.7 90.751,69.525 U4.5
IN_21: R29.2 U4.6 | length 15.4
  Top Layer w0.3: R29.2 76.284,68.8 76.534,69.05 76.634,69.05 76.784,69.2 90.443,69.2 90.743,68.9 90.743,68.894 90.762,68.875 U4.6
IN_22: R30.2 U4.7 | length 11.9
  Top Layer w0.3: R30.2@80.034,66.7 83.534,66.7 85.059,68.225 U4.7
IN_23: R31.2 U4.8 | length 16.4
  Top Layer w0.3: R31.2@76.034,64.7 84.034,64.7 86.909,67.575 U4.8
IN_24: R32.2 U4.9 | length 13.2
  Top Layer w0.3: R32.2 84.534,62.7 88.759,66.925 U4.9
IN_26: R33.2 U5.1 | length 18.4
  Top Layer w0.3: R33.2 79.5,54.5 84.3,49.7 87.176,49.7 90.751,46.125 U5.1
IN_32: R34.2 U5.3 | length 14.5
  Top Layer w0.3: R34.2 79.784,51.9 80.034,51.65 80.134,51.65 83.584,48.2 87.376,48.2 90.738,44.838 91.245,44.838 U5.3
IN_33: R35.2 U5.4 | length 17.4
  Top Layer w0.3: R35.2 79.5,50 82.369,47.131 87.219,47.131 90.162,44.188 90.709,44.188 90.714,44.183 91.25,44.183 U5.4
IN_35: R36.2 U5.5 | length 13.8
  Top Layer w0.3: R36.2 79.784,47.216 80.8,46.2 87.034,46.2 89.709,43.525 U5.5
IN_36: R37.2 U5.6 | length 16.3
  Top Layer w0.3: R37.2 77.734,46 78.534,45.2 86.034,45.2 88.359,42.875 U5.6
IN_37: R38.2 U5.7 | length 12.2
  Top Layer w0.3: R38.2@79.784,43.976 83.524,43.976 85.052,42.448 90.517,42.448 90.732,42.233 91.25,42.233 U5.7
IN_38: R39.2 U5.8 | length 15.4
  Top Layer w0.3: R39.2 81.105,42.5 82.03,41.575 U5.8
IN_40: R40.2 U5.9 | length 11.7
  Top Layer w0.3: R40.2 79.822,40.462 90.306,40.462 90.73,40.887 90.73,40.894 90.762,40.925 U5.9
NetD_3V3_A: D_3V3.A R44.2 | length 3.5
  Top Layer w0.3: D_3V3.A@114.504,95.246 R44.2@118.03,95.246
NetD_5V_A: D_5V.A R45.2 | length 3.5
  Top Layer w0.3: R45.2 107.451,95.25 107.476,95.274 D_5V.A
NetD_FUSE_A: D_FUSE.A R46.2 | length 4
  Top Layer w0.3: R46.2 116.65,107 118.4,105.25 D_FUSE.A
NetR6_1: R6.1 R7.3 | length 7.5
  Bottom Layer w0.3: R7.3 70.5,65.1 70.5,61.75 71.65,60.6 71.65,60.5 71.9,60.25 R6.1
NetSW2_3: SW2.3 U2.4 | length 6.9
  Bottom Layer w0.3: SW2.3 85.15,65.85 85.5,66.2 85.5,71.177 86.135,71.812 U2.4
OUT_3: J6.3 U3.20 | length 32.2
  Top Layer w0.3: U3.20 97.684,84.5 103.5,84.5 107.5,88.5 125.26,88.5 J6.3
OUT_5: J6.5 U3.18 | length 31.7
  Top Layer w0.3: U3.18 97.305,82.325 97.337,82.356 97.337,82.363 98.474,83.5 107.5,83.5 110,86 125,86 126.16,87.16 J6.5
OUT_7: J6.7 U3.17 | length 30.9
  Top Layer w0.3: U3.17 96.822,81.688 97.33,81.688 97.868,82.227 v2(100.18,82.227)
  Bottom Layer w0.3: v2(100.18,82.227) 100.294,82.227 100.841,82.774 109.274,82.774 111.12,84.62 J6.7
OUT_8: J6.8 U3.16 | length 33.7
  Top Layer w0.3: U3.16 101.448,81.025 102.423,82 112,82 113.378,83.378 127.758,83.378 J6.8
OUT_10: J6.10 U3.15 | length 32.9
  Top Layer w0.3: U3.15 99.329,80.375 99.361,80.343 102.343,80.343 v2(102.5,80.5)
  Bottom Layer w0.2: 125.5,80.5 125.85,80.85 127.35,80.85 128.212,81.712 128.253,81.712 128.353,81.812 128.732,81.812 J6.10
  Bottom Layer w0.3: v2(102.5,80.5) 125.5,80.5
OUT_11: J6.11 U3.14 | length 29.9
  Top Layer w0.3: U3.14 96.814,79.72 99.78,79.72 100.193,79.307 126.227,79.307 J6.11
OUT_12: J6.12 U3.13 | length 33.5
  Top Layer w0.3: U3.13 98.925,79.075 100.091,77.909 100.861,77.909 v2(101,77.77)
  Bottom Layer w0.2: 125.298,78.298 125.31,78.31 127.31,78.31 128.192,79.192 128.273,79.192 128.353,79.272 128.732,79.272 J6.12
  Bottom Layer w0.3: v2(101,77.77) 101.528,78.298 125.298,78.298
OUT_13: J6.13 U3.12 | length 30.9
  Top Layer w0.3: U3.12 98.575,78.425 100.345,76.655 102.155,76.655 103,77.5 125.672,77.5 126.172,77 J6.13
OUT_15: J6.15 U4.20 | length 30.7
  Top Layer w0.3: U4.20 97.305,72.125 99,73.82 v2(99,74)
  Bottom Layer w0.3: v2(99,74) 99.262,74 99.722,74.46 J6.15
OUT_16: J6.16 U4.18 | length 34.7
  Top Layer w0.3: U4.18 98.325,70.825 103.202,75.702 127.758,75.702 J6.16
OUT_18: J6.18 U4.17 | length 33.9
  Top Layer w0.3: U4.17 96.812,70.172 99.672,70.172 102.662,73.162 127.758,73.162 J6.18
OUT_19: J6.19 U4.16 | length 30.9
  Top Layer w0.3: U4.16 101.525,69.525 103,71 124.84,71 J6.19
OUT_21: J6.21 U4.15 | length 30.6
  Top Layer w0.3: U4.15 96.817,68.883 104.383,68.883 v2(104.5,69)
  Bottom Layer w0.3: v2(104.5,69) 124.3,69 J6.21
OUT_22: J6.22 U4.14 | length 33.8
  Top Layer w0.3: U4.14 101.051,68.225 101.776,67.5 119,67.5 120.902,65.598 127.758,65.598 J6.22
OUT_23: J6.23 U4.13 | length 31
  Top Layer w0.3: U4.13 98.083,67.575 98.658,67 100.5,67 101,66.5 103,66.5 v2(104,65.5)
  Bottom Layer w0.3: v2(104,65.5) 105.214,64.286 J6.23@126.446,64.286
OUT_24: J6.24 U4.12 | length 33.8
  Top Layer w0.3: U4.12 97.316,66.925 103.673,63.058 127.058,63.058 128.093,64.093 128.793,64.093 J6.24
OUT_26: J6.26 U5.20 | length 39.8
  Top Layer w0.3: U5.20 100.125,46.125 105,51 105,53 112.518,60.518 127.758,60.518 J6.26
OUT_27: J6.27 U1.3 | length 13.8
  Bottom Layer w1.5: U1.3@116.047,51 116.058,51.012 124.267,59.22 J6.27
OUT_29: J6.29
OUT_31: J6.31
OUT_32: J6.32 U5.18 | length 36
  Top Layer w0.3: U5.18 98.825,44.825 99.5,45.5 102.5,45.5 109.842,52.842 127.702,52.842 J6.32
OUT_33: J6.33 U5.17 | length 33.4
  Top Layer w0.3: U5.17 100.413,44.175 100.738,44.5 v2(102,44.5)
  Bottom Layer w0.3: v2(102,44.5) 102,45.64 102.86,46.5 121.36,46.5 J6.33
OUT_35: J6.35 U5.16 | length 32.2
  Top Layer w0.3: U5.16 100.283,43.525 100.538,43.27 103.27,43.27 107.227,47.227 114.227,47.227 116.06,49.06 J6.35
OUT_36: J6.36 U5.15 | length 35.1
  Top Layer w0.3: U5.15 100.329,42.875 100.704,42.5 v2(104.5,42.5)
  Bottom Layer w0.2: 125.5,47.5 125.83,47.83 126.97,47.83 127.932,48.792 128.732,48.792 J6.36
  Bottom Layer w0.3: v2(104.5,42.5) 105.88,43.88 121.88,43.88 125.5,47.5
OUT_37: J6.37 U5.14 | length 32.4
  Top Layer w0.3: U5.14@96.823,42.239 96.83,42.233 97.353,42.233 97.359,42.239 100.338,42.239 101.577,41 106.5,41 108.384,42.884 117.884,42.884 121.52,46.52 J6.37
OUT_38: J6.38 U5.13 | length 36.2
  Top Layer w0.3: U5.13 99.425,41.575 100,41 v2(100.072,41)
  Bottom Layer w0.2: 127.395,43.105 127.77,43.48 127.77,45.29 J6.38
  Bottom Layer w0.3: v2(100.072,41) 100.108,41 100.608,40.5 124.79,40.5 127.395,43.105
OUT_40: J6.40 U5.12 | length 34.6
  Top Layer w0.3: U5.12 96.817,40.917 97.583,40.917 99,39.5 124.52,39.5 J6.40
PI_3: J7.3 R13.1 | length 12
  Top Layer w0.3: J7.3 65.758,90.998 68.96,90.998 71.662,93.7 R13.1@74.784,93.7
PI_5: J7.5 R14.1 | length 15.7
  Top Layer w0.3: J7.5 65.758,88.458 68.958,88.458 72.2,91.7 R14.1
PI_7: J7.7 R15.1 | length 12.4
  Top Layer w0.3: J7.7 65.758,85.918 68.42,85.918 72.202,89.7 R15.1@74.784,89.7
PI_8: J7.8 R17.1 | length 12.7
  Top Layer w0.3: J7.8 69.62,84.62 72.831,87.831 78.153,87.831 R17.1
PI_10: J7.10 R18.1 | length 9.6
  Top Layer w0.3: J7.10 69.422,82.08 72.692,85.35 74.784,85.35 75.034,85.6 R18.1@75.034,85.7
PI_11: J7.11 R19.1 | length 15.8
  Top Layer w0.3: J7.11 65.758,80.838 70.755,80.838 73.617,83.7 R19.1@78.534,83.7
PI_12: J7.12 R21.1 | length 8.9
  Top Layer w0.3: J7.12 71.54,79.54 73.577,81.577 R21.1@75.01,81.577
PI_13: J7.13 R23.1 | length 14.9
  Top Layer w0.3: J7.13 65.758,78.298 71.61,78.298 73.012,79.7 R23.1
PI_15: J7.15 R24.1 | length 11.7
  Top Layer w0.3: J7.15 65.758,75.758 71.258,75.758 73.2,77.7 R24.1@74.784,77.7
PI_16: J7.16 R26.1 | length 11.6
  Top Layer w0.3: J7.16 73.46,74.46 74.189,75.189 R26.1@78.273,75.189
PI_18: J7.18 R27.1 | length 8.3
  Top Layer w0.3: J7.18 68.28,73.2 R27.1@74.784,73.2
PI_19: J7.19 R28.1 | length 14.4
  Top Layer w0.3: J7.19 65.758,70.678 72.05,70.678 72.072,70.7 R28.1
PI_21: J7.21 R29.1 | length 11.1
  Top Layer w0.3: J7.21 65.758,68.138 70.03,68.138 70.592,68.7 R29.1@74.784,68.7
PI_22: J7.22 R30.1 | length 11.6
  Top Layer w0.3: J7.22 78.394,66.84 R30.1@78.534,66.7
PI_23: J7.23 R31.1 | length 11
  Top Layer w0.3: J7.23 65.702,65.542 68.958,65.542 69.86,64.64 74.473,64.64 R31.1@74.534,64.7
PI_24: J7.24 R32.1 | length 13
  Top Layer w0.3: J7.24 67.012,64.288 68.212,64.288 71,61.5 77.084,61.5 77.934,62.35 78.034,62.35 78.284,62.6 R32.1
PI_26: J7.26 R33.1 | length 11.1
  Top Layer w0.3: J7.26 67.234,61.526 67.234,61.116 73.889,54.461 74.745,54.461 R33.1
PI_27: J7.27
PI_28: J7.28
PI_29: J7.29
PI_31: J7.31
PI_32: J7.32 R34.1 | length 12.2
  Top Layer w0.3: J7.32 70.096,54.14 72.236,52 R34.1
PI_33: J7.33 R35.1 | length 11.7
  Top Layer w0.3: J7.33 65.702,52.842 68.322,52.842 71.164,50 R35.1@74.5,50
PI_35: J7.35 R36.1 | length 15.3
  Top Layer w0.3: J7.35 65.702,50.302 69.198,50.302 71.5,48 R36.1
PI_36: J7.36 R37.1 | length 9.1
  Top Layer w0.3: J7.36 67.06,49 69,49 72,46 R37.1
PI_37: J7.37 R38.1 | length 15.9
  Top Layer w0.3: J7.37 65.702,47.762 67.738,47.762 71.5,44 R38.1
PI_38: J7.38 R39.1 | length 9.4
  Top Layer w0.3: J7.38 71.02,42.5 R39.1
PI_40: J7.40 R40.1 | length 12.7
  Top Layer w0.3: J7.40 70.48,40.5 R40.1
PI_GND_UnP: J7.39 R1.1 | length 9.1
  Top Layer w0.3: R1.1 64.355,35.105 64.355,43.875 J7.39
SHUNT_LOW: R2.1 U1.2 U7.10 | length 49.3
  Bottom Layer w0.3: U7.10 84.477,58.5 84.5,58.477 84.5,56.958 85.008,56.45 85.008,47.44 R2.1 ; R2.1@85.948,44 R2.1@85.948,45.052
  Bottom Layer w1.5: 110.827,48.215 U1.2@113.556,50.944
  Bottom Layer w2: R2.1@85.948,45.052 86.699,44.301 86.699,43.672 87.87,42.5 93.328,42.5 94.5,43.672 94.5,47 97.5,50 107.308,50 109.093,48.215 110.827,48.215
SR_Q: U1.1 U2.2 | length 44.8
  Bottom Layer w0.3: U2.2 88.675,74.175 91,76.5 92,76.5 93.991,74.509 93.991,59.009 96,57 104.96,57 U1.1
V_LOGIC: C16.1 C18.1 C20.1 C22.1 C23.1 C25.1 R46.1 SW1.2 U3.19 U4.19 U5.19 U6.3 | length 146.3
  Top Layer w0.3: U6.3@82.434,31.115 82.459,31.09 82.501,31.133 85.466,31.133 v2(85.534,31.2) ; U5.19 96.302,45.475 95.034,46.743 95.034,48.2 95.891,49.057 C25.1 C25.1@97.184,49.057 ; U4.19 95.809,71.475 95.034,70.7 ; U3.19 96.291,82.975 95.858,83.407 95.826,83.407 95.534,83.7 95.534,84.2 ; v2(99.247,47.24) 99.001,47.24 C25.1@97.184,49.057 ; C16.1 C18.1 97.534,86.2 95.534,84.2 ; 95.034,70.7 95.034,83.7 95.534,84.2 ; 95.034,70.7 95.034,65.7 96.493,64.24 98.786,64.24 100.177,62.85 100.177,62.7 100.177,59.2 100.177,59.05 100.377,58.849 101.151,58.849 103.034,56.966 103.034,50.7 101.941,49.607 101.584,49.607 C23.1 C25.1@97.184,49.057
  Top Layer w0.5: U6.3 U6.3@82.434,31.115 ; SW1.2@86.917,103.083 88.834,105 95.698,105 97.827,107.128 113.622,107.128 R46.1 ; SW1.2 87,101.6 89.462,99.138 89.462,99.038 v2(89.5,99) ; v2(96.534,91.2) C16.1
  Bottom Layer w0.3: v2(85.534,31.2) 95.2,31.2 99.242,35.242 v2@99.242,47.235
  Bottom Layer w0.5: v2(89.5,99) 96.534,91.966 v2(96.534,91.2)
Vout: pad.10 R4.2 R5.2 U7.9 | length 10.9
  Bottom Layer w0.3: U7.9 84.11,58.99 84.853,58.99 85.743,58.1 85.743,56.5 ; R5.2 85.743,56.5 ; R4.2 89.6,56.25 90,55.85 pad.10 ; R4.2@89.654,56.5 85.743,56.5
pads on no net: J7.2 J7.4 J7.6 J7.9 J7.14 J7.20 J7.25 J7.30 J7.34 SW1.4 SW1.5 SW1.6 SW2.1 SW2.4 U1.4 U2.1 U2.5 U2.6 U2.7 U2.9 U2.10 U2.11 U2.12 U2.13 U2.14 U2.15 U6.5 U6.6 U6.7 U7.6

## Polygon pours and split planes (outlines as drawn)
GND on Int2 (GND) "GND_L03_P001" (solid, pour order 1): 133.01,111.744 cw(c133.014,109.204) 135.554,109.204 135.554,30.784 cw(c133.014,30.784) 133.014,28.244 61.796,28.244 cw(c61.796,30.784) 59.256,30.784 59.256,109.204 cw(c61.796,109.204) 61.796,111.744
GND on Int1 (GND) "GND_L02_P000" (solid, pour order 0): 133.01,111.744 cw(c133.014,109.204) 135.554,109.204 135.554,30.784 cw(c133.014,30.784) 133.014,28.244 61.796,28.244 cw(c61.796,30.784) 59.256,30.784 59.256,109.204 cw(c61.796,109.204) 61.796,111.744

## Silkscreen, mask and mechanical layers (free items; w line width, h text height)
Top Overlay:
  lines w0.254: 99.454,104.95 cw(c99.454,104.904) 99.5,104.904 ; 99.524,102.768 99.524,103.669 ; 101.994,104.95 ccw(c101.994,104.956) 102,104.956 ; 102,106.26 102,107 ; 104.5,103 104.5,103.714 ; 104.5,104.916 cw(c104.534,104.916) 104.534,104.95 ; 121.5,54 126.32,54 ccw(c126.32,54.14) 126.46,54.14 ; 121.5,56.75 126.25,56.75 ccw(c126.25,57) 126.5,57 ; 126,59 121.5,59 ; 126.18,59.5 cw(c126.18,59.22) 126.46,59.22 ; 129,59.22 132.73,59.22 ccw(c132.73,60.49) 134,60.49 134,61 ; 121.5,59 cw(c121,59) 121,58.5 115.5,58.5 cw(c115.5,59) 115,59 115,59.5 cw(c115.5,59.5) 115.5,60 121,60 cw(c121,59.5) 121.5,59.5 121.5,59 ; 134,61 cw(c134,61.5) 133.5,61.5 133.5,65.5 cw(c134,65.5) 134,66 134.5,66 cw(c134.5,65.5) 135,65.5 135,61.5 cw(c134.5,61.5) 134.5,61 134,61 ; 118.5,53.25 ccw(c119,53.25) 119,52.75 121,52.75 ccw(c121,53.25) 121.5,53.25 121.5,54.75 ccw(c121,54.75) 121,55.25 120,55.25 119,55.25 ccw(c119,54.75) 118.5,54.75 118.5,53.25 ; 118.5,56 ccw(c119,56) 119,55.5 121,55.5 ccw(c121,56) 121.5,56 121.5,57.5 ccw(c121,57.5) 121,58 120,58 119,58 ccw(c119,57.5) 118.5,57.5 118.5,56
  text "5V Out | 3V3 Out" at 80.127,109.736 h1
  text "3V3" at 100.866,107.526 h1.5
  text "GND" at 98.081,101.52 h1.5
  text "5V" at 103.713,101.528 h1.5
  text "PI" at 63.586,99.5 h3
  text "OUT" at 124.472,99.5 h3
  text "Latch In" at 133.957,65.345 h1 r270
  text "Latch Out" at 116.086,59.008 h1
  text "NC" at 119.254,56.254 h1
  text "NC" at 119.254,53.504 h1
  text "SAILBOT" at 101.841,34.25 h2.5
  text "PI GPIO Protection" at 95.718,29.25 h2.5

## Text inside footprints (layer, text, board x,y; h text height)
D_3V3: Mechanical 13 "+" at 115.108,94.683 h0.5 r270
D_5V: Mechanical 13 "+" at 108.108,94.683 h0.5 r270
D_EN: Mechanical 13 "+" at 87.158,38.283 h0.5
D_FUSE: Mechanical 13 "+" at 117.892,105.817 h0.5 r90
U2: Mechanical 13 "*" at 89.107,73.108 h1.27 r270